# EAGLE board driver (EAGLE 9.6.1)
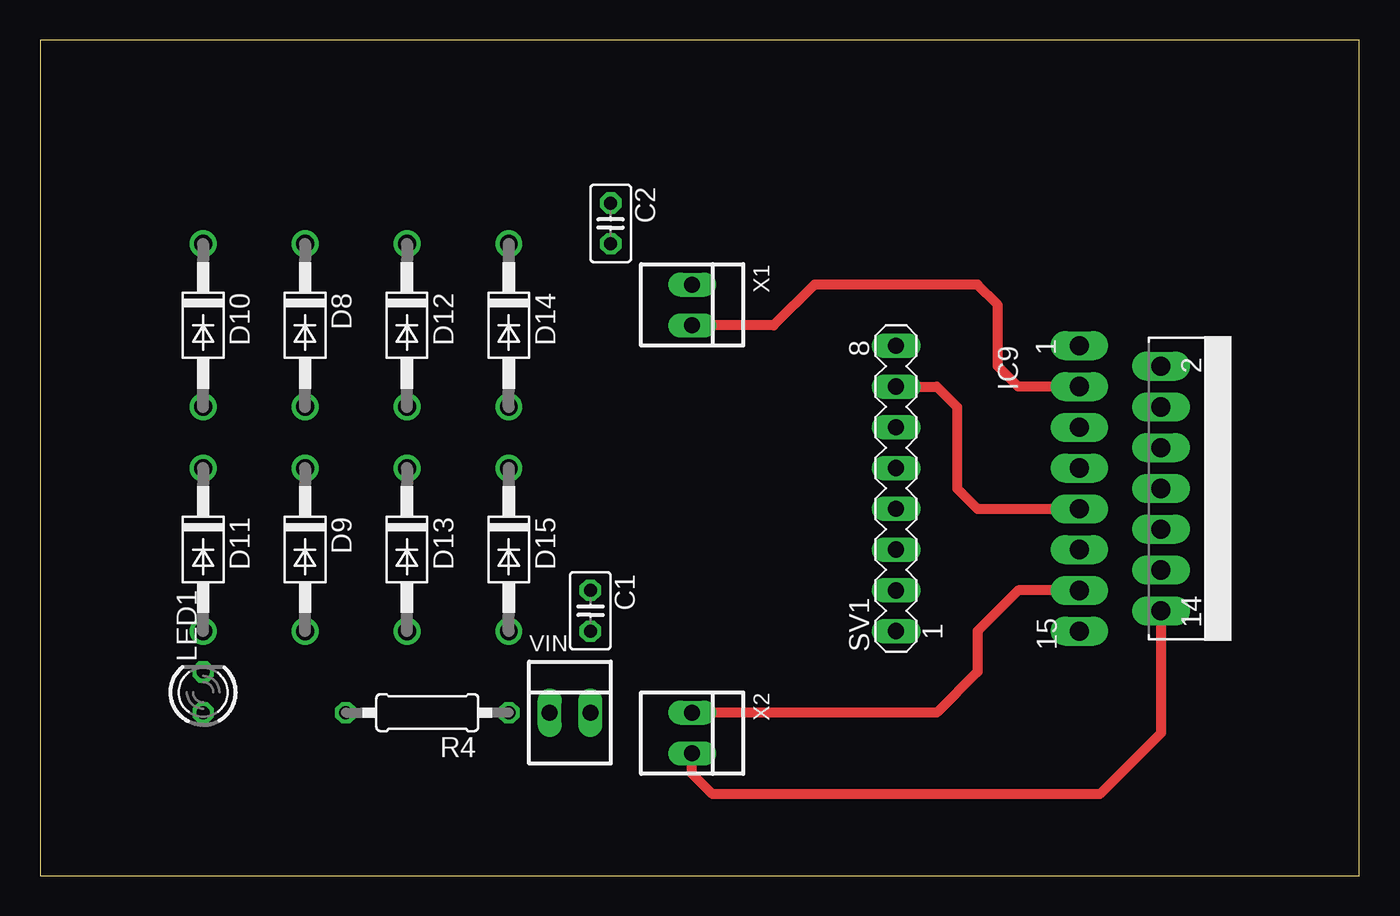
[diagram p0: board, top side]
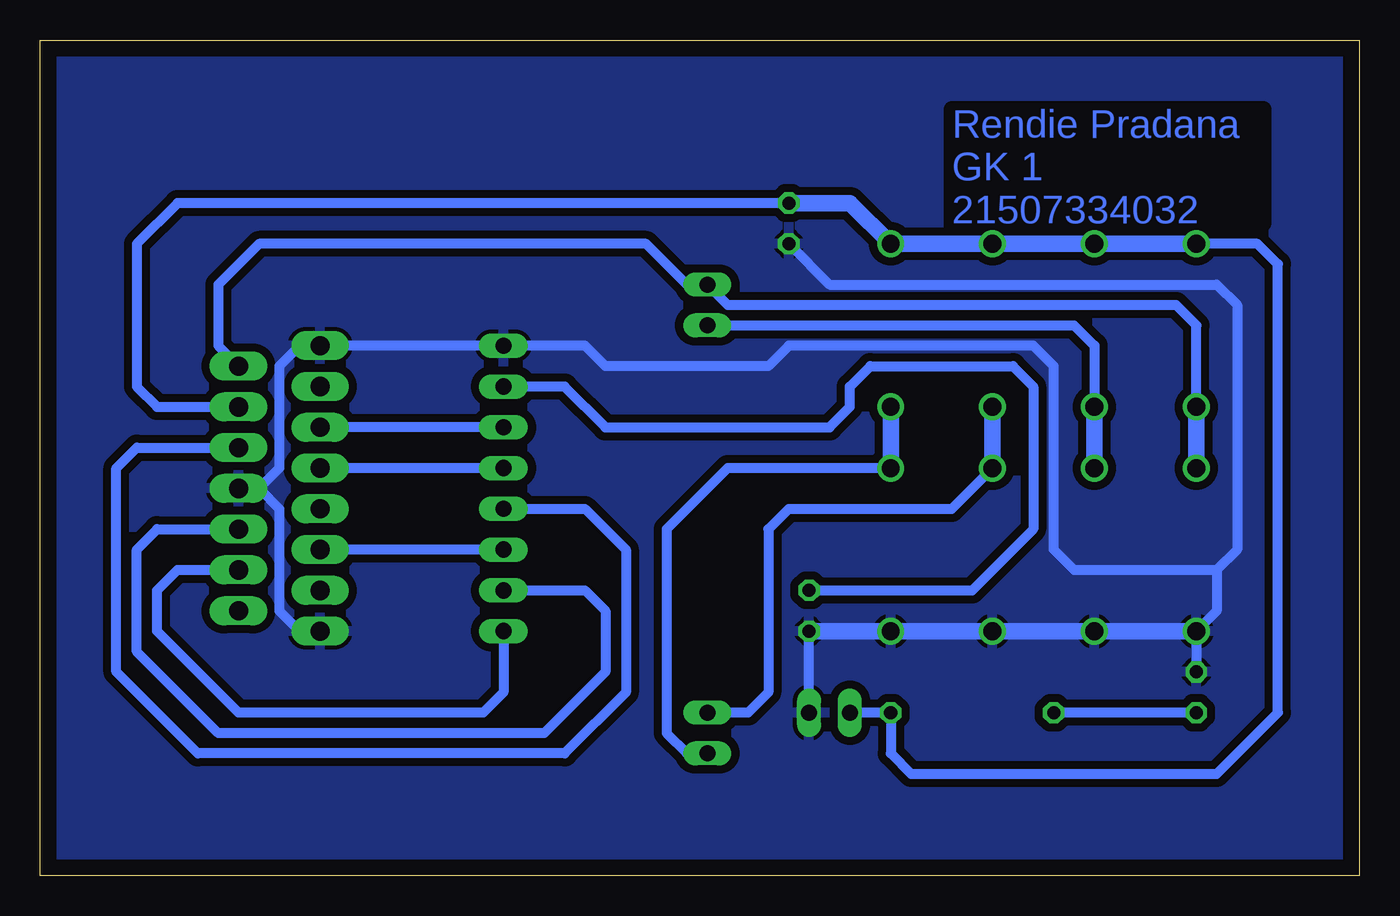
[diagram p1: board, bottom side, seen from below]

Size 82.22 x 52.06 mm. Coordinates in mm from the lower left corner, seen from the top.
Outline: 0,0 82.22,0 82.22,52.06 0,52.06 0,0
Copper layers (1*16): Top 0.035mm / dielectric 1.5mm / Bottom 0.035mm
Design rules "default *": minimum track width 6mil, minimum drill 0.35mm, track to track 20mil, track to pad 15mil, pad to pad 10mil, via to via 10mil, smd to smd 10mil, copper to edge 40mil, drill to drill 6mil, minimum pad ring 10mil, minimum via ring 8mil, stop-mask expansion 4mil, vias tented up to drill 0mil, thermal gap 10mil

## Footprints (pad centres in the part's own frame; a part is rotated, then mirrored left to right if it is on the bottom)
C025-025X050 = drill 0.813 octagon: 1 -1.27,0; 2 1.27,0
DO41-10 = drill 1.118: A 5.08,0; C -5.08,0
MULTIWATT-15 = drill 1.2 long: 1 -8.89,-7.62; 2 -7.62,-2.54; 3 -6.35,-7.62; 4 -5.08,-2.54; 5 -3.81,-7.62; 6 -2.54,-2.54; 7 -1.27,-7.62; 8 0,-2.54; 9 1.27,-7.62; 10 2.54,-2.54; 11 3.81,-7.62; 12 5.08,-2.54; 13 6.35,-7.62; 14 7.62,-2.54; 15 8.89,-7.62
LED3MM = drill 0.813 octagon: A -1.27,0; K 1.27,0
0207/10 = drill 0.813 octagon: 1 -5.08,0; 2 5.08,0
MA08-1 = drill 1.016 long: 1 -8.89,0; 2 -6.35,0; 3 -3.81,0; 4 -1.27,0; 5 1.27,0; 6 3.81,0; 7 6.35,0; 8 8.89,0
22-23-2021 = drill 1 long: 1 -1.27,0; 2 1.27,0

## Placement (x,y rotation side)
C1  100nF  [C025-025X050]  34.29,16.51 270 top
C2  100nF  [C025-025X050]  35.56,40.64 270 top
D8  1N4004  [DO41-10]  16.51,34.29 270 top
D9  1N4004  [DO41-10]  16.51,20.32 270 top
D10  1N4004  [DO41-10]  10.16,34.29 270 top
D11  1N4004  [DO41-10]  10.16,20.32 270 top
D12  1N4004  [DO41-10]  22.86,34.29 270 top
D13  1N4004  [DO41-10]  22.86,20.32 270 top
D14  1N4004  [DO41-10]  29.21,34.29 270 top
D15  1N4004  [DO41-10]  29.21,20.32 270 top
IC9  L298  [MULTIWATT-15]  72.39,24.13 270 top
LED1  [LED3MM]  10.16,11.43 90 top
R4  330  [0207/10]  24.13,10.16 180 top
SV1  [MA08-1]  53.34,24.13 90 top
VIN  22-23-2021  [22-23-2021]  33.02,10.16 0 top
X1  22-23-2021  [22-23-2021]  40.64,35.56 270 top
X2  22-23-2021  [22-23-2021]  40.64,8.89 270 top

## Library data of the parts
C1 C2 R4 = rcl
D8-D15 = diode
IC9 = st-microelectronics
LED1 = led
SV1 = con-lstb; OC_FARNELL: unknown; OC_NEWARK: unknown
VIN X1 X2 = con-molex; MF: MOLEX; MPN: 22-23-2021; OC_FARNELL: 1462926; OC_NEWARK: 25C3832

## Nets
GND: C1.2 C2.2 D9.A D11.A D13.A D15.A IC9.1 IC9.8 IC9.15 LED1.K SV1.8 VIN.2
N$1: IC9.5 SV1.6
N$3: IC9.7 SV1.5
N$5: IC9.12 SV1.1
N$8: IC9.10 SV1.2
N$16: IC9.6 SV1.4
N$17: IC9.11 SV1.3
N$44: LED1.A R4.2
N$204: D8.A D9.C IC9.3 X1.2
N$205: D10.A D11.C IC9.2 X1.1
N$206: D12.A D13.C IC9.13 X2.1
N$207: D14.A D15.C IC9.14 X2.2
VCC: C1.1 IC9.9 SV1.7
VDD: C2.1 D8.C D10.C D12.C D14.C IC9.4 R4.1 VIN.1

## Tracks (layer width: path | path; a pad name or v marks a point on that pad's centre or on a via)
GND
  Bottom 0.61: LED1.K D11.A 8.89,16.51 8.89,19.05 | VIN.2 C1.2 | 68.58,24.13 67.31,25.4 67.31,31.75 66.04,33.02 IC9.1 SV1.8 48.26,33.02 46.99,31.75 36.83,31.75 35.56,33.02 20.32,33.02 19.05,31.75 19.05,20.32 17.78,19.05 8.89,19.05 | IC9.8 68.58,24.13 | 68.58,24.13 67.31,22.86 67.31,16.51 66.04,15.24 IC9.15 | C2.2 33.02,36.83 8.89,36.83 7.62,35.56 7.62,20.32 8.89,19.05
  Bottom 1.016: D11.A D9.A D13.A D15.A C1.2
  pour Bottom: 0,52.07 82.55,52.07 82.55,0 0,0
N$1
  Bottom 0.61: SV1.6 IC9.5
N$3
  Bottom 0.61: SV1.5 IC9.7
N$5
  Bottom 0.61: IC9.12 73.66,19.05 74.93,17.78 74.93,15.24 69.85,10.16 54.61,10.16 53.34,11.43 SV1.1
N$8
  Bottom 0.61: SV1.2 48.26,17.78 46.99,16.51 46.99,12.7 50.8,8.89 71.12,8.89 76.2,13.97 76.2,20.32 74.93,21.59 IC9.10
N$16
  Bottom 0.61: SV1.4 48.26,22.86 45.72,20.32 45.72,11.43 49.53,7.62 72.39,7.62 77.47,12.7 77.47,25.4 76.2,26.67 IC9.6
N$17
  Bottom 0.61: SV1.3 IC9.11
N$44
  Bottom 0.61: LED1.A R4.2
N$204
  Top 0.61: IC9.3 60.96,30.48 59.69,31.75 59.69,35.56 58.42,36.83 48.26,36.83 45.72,34.29 X1.2
  Bottom 0.61: X1.2 17.78,34.29 16.51,33.02 D8.A
  Bottom 1.016: D8.A D9.C
N$205
  Bottom 0.61: D10.A 10.16,34.29 11.43,35.56 39.37,35.56 X1.1 41.91,36.83 44.45,39.37 68.58,39.37 71.12,36.83 71.12,33.02 IC9.2
  Bottom 1.016: D10.A D11.C
N$206
  Top 0.61: IC9.13 60.96,17.78 58.42,15.24 58.42,12.7 55.88,10.16 X2.1
  Bottom 0.61: D13.C 25.4,22.86 35.56,22.86 36.83,21.59 36.83,11.43 38.1,10.16 X2.1
  Bottom 1.016: D12.A D13.C
N$207
  Top 0.61: IC9.14 69.85,8.89 66.04,5.08 41.91,5.08 40.64,6.35 X2.2
  Bottom 0.61: D15.C 39.37,25.4 43.18,21.59 43.18,8.89 41.91,7.62 X2.2
  Bottom 1.016: D14.A D15.C
VCC
  Top 0.61: SV1.7 55.88,30.48 57.15,29.21 57.15,24.13 58.42,22.86 IC9.9
  Bottom 0.61: C1.1 24.13,17.78 20.32,21.59 20.32,30.48 21.59,31.75 30.48,31.75 31.75,30.48 31.75,29.21 33.02,27.94 46.99,27.94 49.53,30.48 SV1.7
VDD
  Bottom 0.61: VIN.1 R4.1 29.21,7.62 27.94,6.35 8.89,6.35 5.08,10.16 5.08,38.1 6.35,39.37 D10.C | C2.1 73.66,41.91 76.2,39.37 76.2,30.48 74.93,29.21 IC9.4
  Bottom 1.016: D10.C D8.C D12.C D14.C 31.75,41.91 C2.1

## Text on the board
Bottom: Rendie Pradana / GK 1 / 21507334032